# Altium PCB HLK-7621-ALL-KIT-V2.4.PcbDoc (part 2 of 2)
Units mm, origin at the board's own origin, x right, y up, seen from the top; angles counter-clockwise.
Board outline 140 x 100 mm, 2 copper layers (Top Layer, Bottom Layer); 119 components, 240 nets, 725 pads, 586 vias.
Unrouted connection lines stored in the file: 2.
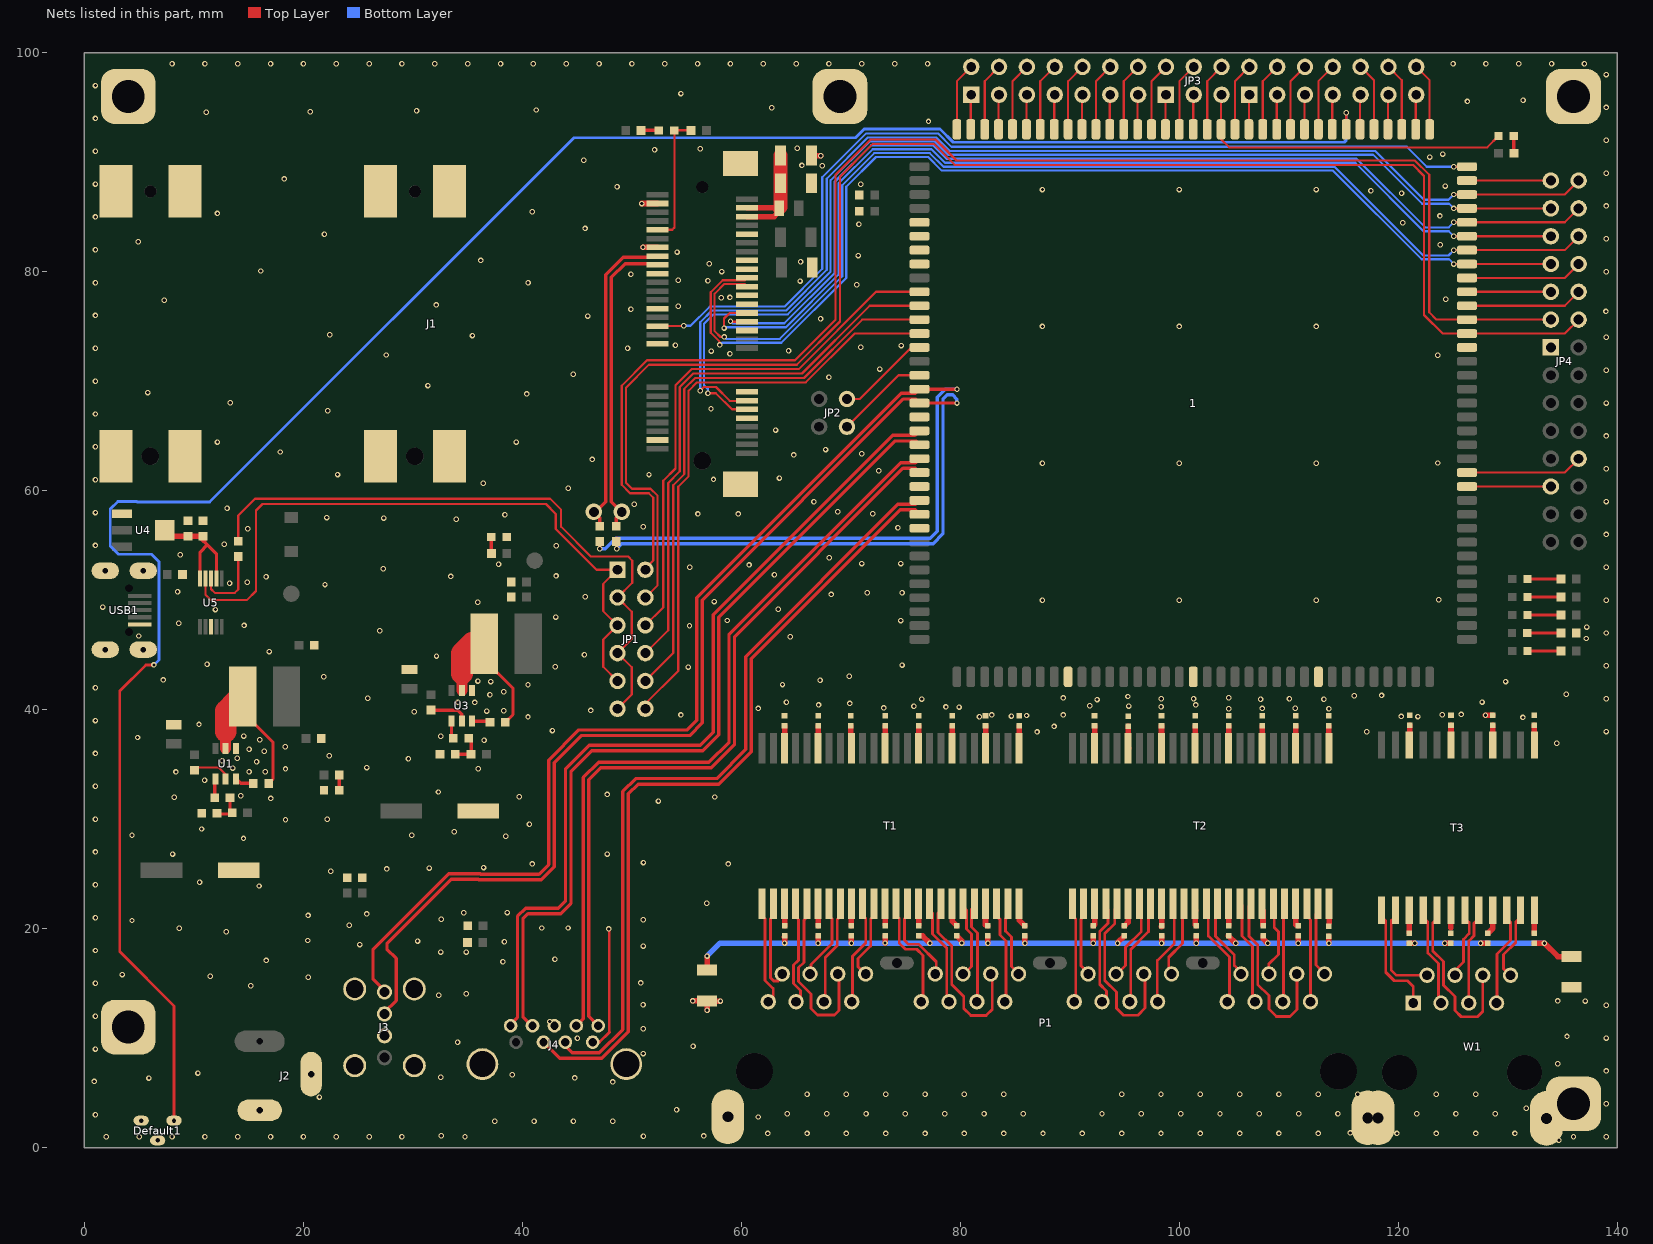
[diagram p2: the nets of this part, all layers, seen from the top]

## Via types
v1: diameter 0.5, hole 0.3, Top Layer to Bottom Layer, tented both sides, 584 vias
v2: diameter 1.5, hole 0.9, Top Layer to Bottom Layer, 2 vias

## Nets (pads, with @x,y where several pads share a name; then routed paths per layer and width w, separated by ;. In a path a pad name is that pad's centre, name@x,y a point inside that pad or via, vN(x,y) a via of type N, cw(c..) or ccw(c..) an arc to the next point about the centre after c; other vN are vias at no path point) (continued)
GND: 1.5 1.6 1.7 1.8 1.19 1.24 1.27 1.44 1.53 1.62 1.92 1.119 1.125 C4.2 C5.2 C7.2 C9.2 C10.2 C11.2 C12.2 C13.2 C14.2 C15.2 C18.2 C19.2 C20.2 C21.2 C22.2 C23.2 C24.2 C25.2 C26.2 C27.1 C28.1 C29.1 C30.1 C31.1 C32.1 C33.1 C34.1 C35.1 C36.1 C37.1 C38.1 C39.1 C40.1 C41.1 C42.1 C43.1 C44.1 C45.1 C46.1 C47.2 C48.2 C49.1 D6.2 D7.2 Default1.2 Default1.3 J1.4 J1.9 J1.15 J1.18 J1.21 J1.26 J1.27 J1.29 J1.34 J1.35 J1.37 J1.40 J1.43 J1.50 J1.55 J1.56 J1.57 J1.58 J1.59 J1.60 J1.63 J1.64 J1.65 J1.66 J2.2 J2.3 J3.4 J3.5 J3.6 J3.7 J3.8 J4.4 J4.7 J4.10 J4.11 JP3.15 JP3.21 JP4.13 pad.0@58.758,2.815 pad.0@117.208,2.715 pad.0@118.158,2.715 pad.1@4,11 pad.1@4,96 pad.1@69,96 pad.1@136,4 pad.1@136,96 R4.1 R11.1 R46.1 U1.1 U3.1 U4.1 U5.3 USB1.5 USB1.6 USB1.7 USB1.8 USB1.9 W1.10 | length 25.5
  Top Layer w0.2: 1.125@98.73,93 98.73,96.119 JP3.15@98.776,96.164 ; 1.119@106.35,93 106.35,96.119 JP3.21@106.396,96.164
  Top Layer w0.254: J4.4@46.421,9.627 47.048,9.627 47.96,10.539 ; v1(47.893,19.968) 47.93,19.93 47.93,10.539
  Top Layer w0.508: v1(50.888,86.225) 50.94,86.225 50.942,86.227 J1.50@52.325,86.227 ; v1(51.015,82.238) 52.325,82.238 J1.40@52.325,82.227 ; v1(55.562,13.396) C23.2@56.796,13.396 ; v1(56.866,12.545) C23.2@56.866,13.38 ; v1(58.089,13.38) C23.2@56.866,13.38 ; C25.2@66.385,90.62 66.385,90.594 v1(67.245,90.594) ; v1(127.963,39.495) C45.1@128.623,39.495 ; C23.2@56.796,13.396 56.796,13.405 C23.2@56.866,13.405 C23.2@56.866,13.38 ; C23.2@56.796,13.396 56.796,13.38 C23.2@56.866,13.38
  other v1: 134.671,0.66 2,1 5,1 8,1 11,1 14,1 17,1 20,1 23,1 26,1 29,1 34.755,0.994 136,1 139,1 51.058,1.031 32.587,1.069 56.558,1.065 62.403,1.289 65.995,1.289 69.587,1.289 73.179,1.289 76.772,1.289 80.364,1.289 83.956,1.289 87.548,1.289 91.14,1.289 94.732,1.289 98.324,1.289 101.916,1.289 105.508,1.289 109.101,1.289 112.693,1.289 119.877,1.289 123.469,1.289 127.061,1.289 130.653,1.289 115.618,1.336 37.472,2.402 41.064,2.402 44.656,2.402 48.248,2.402 61.539,2.794 1,3 64.199,3.085 67.791,3.085 71.383,3.085 74.976,3.085 78.568,3.085 82.16,3.085 85.752,3.085 92.936,3.085 96.528,3.085 100.12,3.085 103.712,3.085 107.304,3.085 110.897,3.085 114.489,3.085 121.673,3.085 125.265,3.085 128.857,3.085 54.078,3.445 131.674,3.581 139,4 21.461,4.613 65.995,4.881 69.587,4.881 73.179,4.881 76.772,4.881 80.364,4.881 83.956,4.881 94.732,4.881 98.324,4.881 101.916,4.881 105.508,4.881 109.101,4.881 112.693,4.881 116.285,4.881 123.469,4.881 127.061,4.881 48.248,5.994 0.889,6.045 5.893,6.35 44.778,6.365 32.553,6.426 39.063,6.645 10.363,6.807 139,7 134.567,7.661 51.03,8.584 1,9 55.588,9.245 34.075,9.625 45.029,9.982 139,10 135.405,10.15 51.03,10.865 42.489,11.506 1,12 139,13 51.02,13.034 137.076,13.38 134.549,13.396 32.355,13.919 34.862,14.046 15.175,14.775 1,15 50.82,15.037 20.445,15.56 11.481,15.646 3.454,15.799 38.222,16.967 16.612,17.094 42.974,17.194 32.553,17.856 34.862,17.856 1,18 51.043,18.408 25.146,18.542 38.354,18.796 30.427,18.862 20.394,18.913 12.952,19.726 8.659,20.03 41.755,20.056 44.168,20.056 24.178,20.31 4.341,20.742 51.03,20.811 32.587,20.848 1,21 20.419,21.199 25.781,21.336 34.643,21.453 38.608,21.463 56.828,22.316 15.949,23.891 1,24 10.513,24.221 22.504,25.248 27.61,25.451 31.496,25.527 36.449,25.578 40.89,25.908 58.801,25.908 51.054,26.035 8.049,26.812 47.738,26.805 1,27 14.526,28.235 38.479,28.438 4.341,28.514 29.893,28.514 33.78,28.844 10.691,29.098 40.638,29.53 18.362,29.936 1,30 22.172,29.987 52.42,31.65 17.016,31.892 8.202,31.994 57.579,32.019 39.723,32.045 14.272,32.146 47.758,32.255 32.332,32.476 1,33 10.97,33.543 8.354,34.305 15.034,34.331 16.508,34.331 18.362,34.585 35.964,34.61 13.536,34.661 25.779,34.712 15.72,35.245 12.571,35.321 29.589,35.524 13.942,35.55 22.35,35.778 1,36 16.431,36.21 15.034,36.388 18.336,36.617 134.459,36.941 36.497,37.201 16,37.252 4.849,37.455 32.535,37.556 14.552,37.582 87.008,37.965 117.108,37.985 139,38 42.746,38.09 88.558,38.465 10.462,38.649 1,39 131.381,39.286 40.511,39.334 81.738,39.355 121.788,39.365 120.278,39.375 84.668,39.415 86.048,39.465 54.481,39.512 82.858,39.515 89.408,39.515 124.008,39.545 125.738,39.565 30.122,39.817 36.751,39.868 38.301,39.893 46.253,39.929 104.519,40.088 113.663,40.088 61.54,40.11 107.567,40.113 72.998,40.155 110.589,40.139 79.878,40.235 78.678,40.245 98.328,40.275 75.758,40.315 95.388,40.325 91.828,40.355 67.048,40.425 101.498,40.425 69.901,40.564 34.11,40.655 35.659,40.655 64.118,40.675 127.648,40.695 92.481,40.919 107.417,40.945 113.208,40.945 76.468,40.965 98.349,40.996 101.295,40.996 110.058,40.995 139,41 25.88,41.036 89.408,41.065 104.521,41.097 95.301,41.199 115.976,41.275 118.466,41.3 37.031,41.366 135.329,41.417 38.301,41.62 1,42 40.511,42.281 63.754,42.291 37.107,42.56 129.792,42.56 35.939,42.611 67.183,42.672 7.186,42.713 21.867,42.992 69.85,43.053 55.15,43.89 43,43.906 139,44 74.676,44.069 11.199,44.135 32.154,44.897 45.667,45.024 16.889,45.303 137.158,46.497 64.463,46.65 4.948,46.726 139,47 26.972,47.208 137.208,47.539 55.26,47.66 14.577,47.691 8.608,47.894 74.549,48.133 58.7,48.14 43.051,48.453 11.961,49.139 63.371,49.175 1.674,49.367 35.913,49.799 57.52,49.87 87.5,50 100,50 112.5,50 139,50 123.696,50.028 45.743,50.307 68.22,50.52 71.501,50.673 74.676,50.673 8.507,50.764 21.969,51.425 13.256,51.552 14.88,51.64 16.584,52.136 33.449,52.161 43.076,52.212 63.015,52.314 27.277,52.873 55.28,53.01 139,53 60.704,53.216 37.818,53.279 70.993,53.34 74.549,53.34 68.02,53.86 8.761,54.143 43.101,54.955 1,55 12.774,55.108 139,56 14.92,56.51 74.3,56.62 51.026,56.708 33.957,57.394 27.328,57.495 22.121,57.546 38.402,57.8 56.03,57.876 59.713,57.876 72.007,57.902 1,58 68.8,58.07 13.028,58.384 50.213,58.765 66.63,58.99 139,59 44.194,60.213 36.424,60.681 1,61 57.452,61.026 63.472,61.153 23.114,61.468 51.562,61.468 72.54,61.813 139,62 87.5,62.5 100,62.5 112.5,62.5 123.594,62.525 46.378,62.855 64.793,63.261 70.993,63.373 17.882,63.531 67.691,63.754 1,64 12.141,64.44 39.446,64.44 139,65 63.119,65.532 1,67 22.225,67.31 57.224,67.478 13.31,68.021 139,68 40.386,68.834 5.79,68.961 31.369,69.596 1,70 67.993,70.348 44.651,70.627 139,71 72.63,71.11 123.594,72.354 27.559,72.39 58.953,72.517 57.252,72.746 64.31,72.786 1,73 49.604,73.015 70.914,73.091 74.61,73.25 53.975,73.279 139,74 35.433,74.168 22.403,74.244 87.5,75 100,75 112.5,75 67.231,75.707 45.974,75.946 1,76 138.961,76.368 49.911,76.581 54.229,76.835 32.131,76.962 7.29,77.394 124.333,77.47 58.166,77.622 58.953,77.648 70.533,78.806 40.513,78.994 1,79 65.354,79.146 56.947,79.172 54.229,79.223 49.911,79.756 58.217,80.01 139,80 16.104,80.061 57.074,80.721 65.405,80.899 36.195,81.026 70.66,81.473 54.127,81.788 1,82 123.825,82.448 4.902,82.728 139,83 21.92,83.414 45.72,83.947 70.737,84.343 120.396,84.48 1,85 123.8,85.09 12.141,85.319 40.894,85.471 139,86 120.292,87.163 117.498,87.391 87.5,87.5 100,87.5 112.5,87.5 48.641,87.757 124.28,87.823 70.914,87.975 1,88 18.237,88.468 139,89 67.386,89.687 65.53,89.703 45.593,90.17 122.883,90.465 124.049,90.744 1,91 52.07,91.135 56.236,91.237 65.098,91.277 139,92 77.089,93.726 1,94 11.125,94.564 20.625,94.615 30.332,94.691 41.275,94.767 62.763,94.971 139,95 126.312,95.545 131.392,95.646 54.483,96.266 1,97 139,98 8,99 11,99 14,99 17,99 20,99 23,99 26,99 29,99 32,99 35,99 38,99 41,99 44,99 47,99 50,99 53,99 56,99 59,99 62,99 65,99 68,99 71,99 74,99 77,99 125,99 128,99 131,99 134,99 137,99
GPIO0: 1.104 JP4.1 | length 7.7
  Top Layer w0.2: 1.104@126.27,88.32 JP4.1@133.929,88.32
I2C_SCLK: 1.96 JP4.9 | length 7.7
  Top Layer w0.2: 1.96@126.27,78.16 JP4.9@133.929,78.16
I2C_SD: 1.97 JP4.8 | length 10.7
  Top Layer w0.2: 1.97@126.27,79.43 135.199,79.43 JP4.8@136.469,80.7
JTCLK: 1.124 JP3.18 | length 6.2
  Top Layer w0.2: 1.124@100,93 100,97.389 JP3.18@101.316,98.704
JTDI: 1.122 JP3.20 | length 6.2
  Top Layer w0.2: 1.122@102.54,93 102.54,97.389 JP3.20@103.856,98.704
JTDO: 1.121 D9.2 JP3.19 | length 30.2
  Top Layer w0.2: JP3.19@103.856,96.164 103.81,96.119 1.121@103.81,93 103.81,92.108 104.564,91.354 128.115,91.354 D9.2@129.157,92.395
JTMS: 1.120 JP3.22 | length 6.2
  Top Layer w0.2: 1.120@105.08,93 105.08,97.389 JP3.22@106.396,98.704
JTRST_N: 1.123 JP3.17 | length 3.2
  Top Layer w0.2: 1.123@101.27,93 101.27,96.119 JP3.17@101.316,96.164
LDO-3.3V: C4.1 C7.1 U4.0 U5.7 U5.10 | length 11.1
  Top Layer w0.3: U5.10@10.555,51.974 10.555,54.376 11.23,55.051 ; 10.996,55.286 11.23,55.051 ; U5.7@12.055,51.974 12.055,54.227 11.23,55.051
  Top Layer w0.5: U4.0@7.32,56.382 7.858,55.844 C4.1@9.446,55.844 10.539,55.844 10.678,55.705 C7.1@10.894,55.489
LED_WLAN_SOCKET: D8.1 J1.44 R16.2 | length 12.2
  Top Layer w0.2: J1.44@52.325,83.827 53.683,83.827 53.894,84.038 53.894,92.808 53.83,92.872 D8.1@53.797,92.906
  Top Layer w0.254: D8.1@53.797,92.906 53.804,92.913 53.859,92.913 R16.2@55.406,92.913
MDC: 1.83 JP4.22 | length 10.7
  Top Layer w0.2: 1.83@126.27,61.65 135.199,61.65 JP4.22@136.469,62.92
MDIO: 1.82 JP4.23 | length 7.7
  Top Layer w0.2: 1.82@126.27,60.38 JP4.23@133.929,60.38
ND_ALE: 1.138 JP3.4 | length 6.2
  Top Layer w0.2: 1.138@82.22,93 82.22,97.389 JP3.4@83.536,98.704
ND_CLE: 1.137 JP3.3 | length 3
  Top Layer w0.2: 1.137@83.49,93 83.49,95.89 JP3.3@83.536,95.936
ND_CS_N: 1.136 JP3.6 | length 6.2
  Top Layer w0.2: 1.136@84.76,93 84.76,97.389 JP3.6@86.076,98.704
ND_D0: 1.133 JP3.7 | length 3.2
  Top Layer w0.2: 1.133@88.57,93 88.57,96.119 JP3.7@88.616,96.164
ND_D1: 1.132 JP3.10 | length 6.2
  Top Layer w0.2: 1.132@89.84,93 89.84,97.389 JP3.10@91.156,98.704
ND_D2: 1.131 JP3.9 | length 3.2
  Top Layer w0.2: 1.131@91.11,93 91.11,96.119 JP3.9@91.156,96.164
ND_D3: 1.130 JP3.12 | length 6.2
  Top Layer w0.2: 1.130@92.38,93 92.38,97.389 JP3.12@93.696,98.704
ND_D4: 1.129 JP3.11 | length 3.2
  Top Layer w0.2: 1.129@93.65,93 93.65,96.119 JP3.11@93.696,96.164
ND_D5: 1.128 JP3.14 | length 6.2
  Top Layer w0.2: 1.128@94.92,93 94.92,97.389 JP3.14@96.236,98.704
ND_D6: 1.127 JP3.13 | length 3.2
  Top Layer w0.2: 1.127@96.19,93 96.19,96.119 JP3.13@96.236,96.164
ND_D7: 1.126 JP3.16 | length 6.2
  Top Layer w0.2: 1.126@97.46,93 97.46,97.389 JP3.16@98.776,98.704
ND_RB_N: 1.134 JP3.8 | length 6.2
  Top Layer w0.2: 1.134@87.3,93 87.3,97.389 JP3.8@88.616,98.704
ND_RE_N: 1.135 JP3.5 | length 3.2
  Top Layer w0.2: 1.135@86.03,93 86.03,96.119 JP3.5@86.076,96.164
ND_WE_N: 1.139 JP3.1 | length 3.2
  Top Layer w0.2: 1.139@80.95,93 80.95,96.119 JP3.1@80.996,96.164
ND_WP: 1.140 JP3.2 | length 6.2
  Top Layer w0.2: 1.140@79.68,93 79.68,97.389 JP3.2@80.996,98.704
NetC8_1: C8.1 L1.1 U1.2 | length 13.9
  Top Layer w0.3: L1.1@14.457,41.189 14.457,39.785 17.219,37.023 17.219,33.656 C8.1@16.827,33.264
  Top Layer w1: U1.2@12.901,36.467 12.901,38.014
  Top Layer w2: 12.901,38.014 12.901,39.868 L1.1@13.822,40.789
NetC8_2: C8.2 U1.6 | length 1.7
  Top Layer w0.3: U1.6@13.851,33.667 14.254,33.264 C8.2@15.427,33.264
NetC17_1: C17.1 L2.1 U3.2 | length 13.2
  Top Layer w0.3: L2.1@36.529,46.015 36.529,44.56 39.139,41.951 39.139,39.549 C17.1@38.442,38.852
  Top Layer w1: U3.2@34.465,41.75 34.465,43.297
  Top Layer w2: 34.465,43.297 34.465,45.151 L2.1@35.386,46.072
NetC17_2: C17.2 U3.6 | length 1.7
  Top Layer w0.3: U3.6@35.415,38.95 36.943,38.95 C17.2@37.042,38.852
NetC23_1: C23.1 C47.1 R19.1 R20.1 R21.1 R22.1 R23.1 R24.1 R25.1 R26.1 R27.1 R28.1 R29.1 R30.1 R31.1 R32.1 R33.1 R34.1 R35.1 R36.1 R37.1 R38.1 | length 96.3
  Top Layer w0.508: C23.1@56.866,16.205 v1@56.866,17.492 ; R19.1@63.938,19.232 R19.1@63.942,19.236 ; v1@63.942,18.669 R19.1@63.942,19.338 ; v1@67,18.662 R20.1@67,19.331 ; v1@70.048,18.662 R21.1@70.048,19.331 ; v1@73.124,18.676 R22.1@73.124,19.345 ; R23.1@76.195,19.331 76.552,19.331 v1(77.218,18.665) ; R24.1@79.675,19.331 80.128,18.878 v1@80.128,18.666 ; v1@82.52,18.662 R25.1@82.52,19.331 ; v1@85.898,18.662 R26.1@85.898,19.331 ; v1@92.131,18.662 R27.1@92.131,19.331 ; v1@94.358,18.646 94.358,18.713 R28.1@94.976,19.331 ; v1@98.38,18.662 R29.1@98.38,19.331 R29.1@98.38,19.113 ; v1@101.555,18.662 R30.1@101.555,19.331 ; R31.1@104.501,19.331 104.482,19.331 v1(105.148,18.665) ; R32.1@107.651,19.331 107.651,19.082 v1(108.068,18.665) ; v1@110.866,18.662 R33.1@110.866,19.331 ; v1@113.663,18.65 R34.1@113.663,19.319 ; R35.1@121.017,18.665 v1(121.508,18.665) ; v1(124.234,18.659) R36.1@124.796,18.659 ; v1(127.514,18.659) R37.1@128.163,18.659 ; R38.1@132.416,18.665 v1(133.348,18.665) 134.57,17.443 C47.1@135.783,17.443
  Bottom Layer w0.508: v1(56.868,17.495) 58.044,18.671 66.998,18.671 70.048,18.671 v1@73.096,18.671 ; v1@73.124,18.671 82.977,18.671 ; 82.983,18.665 91.988,18.665 95.061,18.665 ; 95.067,18.671 97.937,18.671 ; 97.943,18.665 108.008,18.665 v1(121.508,18.665) v1(133.348,18.665)
  other v1: 67,18.672 70.048,18.672 82.52,18.672 85.898,18.672 92.131,18.672 94.358,18.656 98.38,18.672 101.555,18.672 110.866,18.672 113.663,18.66 63.942,18.679 73.124,18.686 80.128,18.676
NetC27_2: C27.2 T1.22 | length 3
  Top Layer w0.508: T1.22@63.942,37.425 T1.22@63.942,36.478 C27.2@63.942,38.523
NetC28_2: C28.2 T1.19 | length 1.6
  Top Layer w0.508: T1.19@67.002,36.478 T1.19@67.028,36.478 ; T1.19@67.003,36.928 C28.2@67.003,38.523
NetC29_2: C29.2 T1.16 | length 2.1
  Top Layer w0.508: C29.2@70,38.523 70,36.478 T1.16@70.062,36.478
NetC30_2: C30.2 T1.13 | length 2
  Top Layer w0.508: T1.13@73.122,36.478 C30.2@73.122,38.523
NetC31_2: C31.2 T1.10 | length 2
  Top Layer w0.508: T1.10@76.182,36.478 C31.2@76.182,38.522
NetC32_2: C32.2 T1.7 | length 2.1
  Top Layer w0.508: T1.7@79.195,36.478 T1.7@79.242,36.478 ; T1.7@79.245,36.478 C32.2@79.246,38.522
NetC33_2: C33.2 T1.4 | length 2.1
  Top Layer w0.508: T1.4@82.243,36.478 T1.4@82.302,36.478 C33.2@82.303,38.523
NetC34_2: C34.2 T1.1 | length 2
  Top Layer w0.508: T1.1@85.362,36.478 C34.2@85.362,38.523
NetC35_2: C35.2 T2.22 | length 2.1
  Top Layer w0.508: T2.22@92.255,36.478 C35.2@92.255,38.513 ; T2.22@92.263,36.478 T2.22@92.327,36.478
NetC36_2: C36.2 T2.19 | length 2.1
  Top Layer w0.508: T2.19@95.323,36.478 T2.19@95.375,36.478 ; T2.19@95.328,36.48 C36.2@95.328,38.496
NetC37_2: C37.2 T2.16 | length 1.6
  Top Layer w0.508: T2.16@98.372,36.918 C37.2@98.372,38.513 ; T2.16@98.383,36.478 T2.16@98.423,36.478
NetC38_2: C38.2 T2.13 | length 1.6
  Top Layer w0.508: T2.13@101.443,36.478 T2.13@101.471,36.478 ; T2.13@101.445,36.918 C38.2@101.445,38.513
NetC39_2: C39.2 T2.10 | length 1.6
  Top Layer w0.508: T2.10@104.493,36.918 C39.2@104.493,38.513 ; T2.10@104.503,36.478 T2.10@104.519,36.478
NetC40_2: C40.2 T2.7 | length 1.6
  Top Layer w0.508: T2.7@107.563,36.478 T2.7@107.567,36.478 ; T2.7@107.567,36.918 C40.2@107.567,38.513
NetC41_2: C41.2 T2.4 | length 1.6
  Top Layer w0.508: T2.4@110.615,36.478 T2.4@110.623,36.478 ; T2.4@110.615,36.918 C41.2@110.615,38.513
NetC42_2: C42.2 T2.1 | length 1.6
  Top Layer w0.508: T2.1@113.663,36.478 T2.1@113.683,36.478 ; T2.1@113.663,36.918 C42.2@113.663,38.513
NetC43_2: C43.2 T3.10 | length 1.6
  Top Layer w0.508: T3.10@121.003,37.055 121.029,37.055 C43.2@121.029,38.581
NetC44_2: C44.2 T3.7 | length 1.5
  Top Layer w0.508: T3.7@124.813,37.055 C44.2@124.813,38.581
NetC45_2: C45.2 T3.4 | length 1.5
  Top Layer w0.508: T3.4@128.623,37.055 C45.2@128.623,38.581
NetC46_2: C46.2 T3.1 | length 1.5
  Top Layer w0.508: T3.1@132.433,37.055 C46.2@132.433,38.581
NetD0_1: D0.1 R43.2 | length 3.1
  Top Layer w0.3: D0.1@131.798,51.933 R43.2@134.857,51.933
NetD1_1: D1.1 R44.2 | length 3.1
  Top Layer w0.3: D1.1@131.798,50.288 R44.2@134.857,50.288
NetD2_1: D2.1 R45.2 | length 3.1
  Top Layer w0.3: D2.1@131.798,48.644 R45.2@134.857,48.644
NetD3_2: D3.2 R46.2 | length 3.1
  Top Layer w0.3: D3.2@131.773,46.999 R46.2@134.857,46.999
NetD4_1: D4.1 R47.2 | length 3.1
  Top Layer w0.3: D4.1@131.798,45.354 R47.2@134.857,45.354
NetD6_1: D6.1 R41.2 | length 1.5
  Top Layer w0.305: D6.1@37.168,55.766 37.168,54.282 R41.2@37.18,54.27
NetD7_1: D7.1 R42.2 | length 1.4
  Top Layer w0.3: D7.1@23.276,32.631 23.278,32.633 R42.2@23.278,34.026
NetD8_2: D8.2 R15.1 | length 1.5
  Top Layer w0.305: R15.1@50.837,92.906 D8.2@52.297,92.906
NetD9_1: D9.1 R40.2 | length 1.6
  Top Layer w0.3: R40.2@130.554,90.82 D9.1@130.554,92.395
NetJ1_36: J1.36 R48.1 | length 28
  Top Layer w0.305: R48.1@48.562,56.849 48.562,57.546 v2(49.07,58.054) 48.127,58.997 48.127,79.489 49.375,80.736 52.215,80.736 J1.36@52.325,80.627
NetJ1_38: J1.38 R49.1 | length 29
  Top Layer w0.305: R49.1@47.064,56.849 47.064,57.521 v2(46.53,58.054) 46.683,58.054 47.623,58.994 47.623,79.72 49.223,81.321 52.218,81.321 J1.38@52.325,81.427
NetP1_1: P1.1 T1.25 | length 8.3
  Top Layer w0.254: T1.25@61.908,21.165 62.158,20.915 62.158,15.265 62.904,14.519 P1.1@62.904,13.366
  Top Layer w0.3: P1.1@62.863,13.325 P1.1@62.904,13.366
NetP1_2: P1.2 T1.26 | length 8.8
  Top Layer w0.254: T1.26@62.922,21.179 62.658,20.915 62.658,15.515 62.958,15.215 63.358,15.215 P1.2@64.07,15.927
  Top Layer w0.3: T1.26@62.922,21.179 T1.26@62.922,22.278 ; P1.2@64.07,15.927 P1.2@64.133,15.865
NetP1_3: P1.3 T1.28 | length 9.6
  Top Layer w0.254: T1.28@64.889,22.204 T1.28@64.962,22.278 64.962,21.061 65.208,20.815 65.208,17.115 64.768,16.675 64.768,14.975 65.403,14.34 P1.3@65.403,13.325
NetP1_4: P1.4 T1.31 | length 6.3
  Top Layer w0.254: P1.4@66.368,15.865 66.368,16.725 68.281,18.638 68.281,20.892 T1.31@67.958,21.215 ; P1.4@66.786,15.865 P1.4@66.858,15.865
NetP1_5: P1.5 T1.32 | length 8.3
  Top Layer w0.254: P1.5@67.943,13.325 67.658,13.609 67.658,17.365 68.758,18.465 68.758,20.815 T1.32@68.908,20.965 ; T1.32@69.008,21.615 T1.32@69.058,21.615
NetP1_6: P1.6 T1.29 | length 15.6
  Top Layer w0.254: T1.29@66.008,21.065 65.708,20.765 65.708,16.915 65.228,16.435 65.228,15.165 66.358,14.035 66.358,12.715 66.958,12.115 68.508,12.115 68.908,12.515 68.908,15.469 P1.6@69.213,15.774
  Top Layer w0.3: P1.6@69.213,15.774 P1.6@69.258,15.819
NetP1_7: P1.7 T1.34 | length 10
  Top Layer w0.254: P1.7@70.178,13.325 70.158,13.345 70.158,17.471 71.358,18.671 71.358,20.915 T1.34@71.082,21.191
  Top Layer w0.3: P1.7@70.158,13.649 P1.7@70.483,13.325 ; T1.34@71.082,21.191 T1.34@71.082,22.278
NetP1_8: P1.8 T1.35 | length 8
  Top Layer w0.254: P1.8@71.308,15.865 70.658,16.515 70.658,17.264 71.808,18.414 71.808,20.865 T1.35@72.102,21.159 ; T1.35@71.908,20.965 T1.35@72.102,21.159 ; T1.35@72.102,22.278 T1.35@72.102,21.159
  Top Layer w0.3: P1.8@71.308,15.865 P1.8@71.753,15.865
NetP1_9: P1.9 T1.37 | length 9.3
  Top Layer w0.254: T1.37@74.258,21.065 74.408,20.915 74.408,18.683 74.98,18.111 76.02,18.111 76.588,17.543 76.588,13.345 P1.9@76.608,13.325
NetP1_10: P1.10 T1.38 | length 7.5
  Top Layer w0.254: T1.38@75.058,21.065 74.885,20.892 74.885,18.938 75.258,18.565 76.208,18.565 77.798,16.975 P1.10@77.798,15.865
  Top Layer w0.3: P1.10@77.808,16.159 P1.10@78.103,15.865
NetP1_11: P1.11 T1.40 | length 9.2
  Top Layer w0.254: T1.40@77.208,21.665 77.458,21.415 77.458,19.519 78.758,18.219 78.758,13.939 P1.11@79.172,13.526
  Top Layer w0.305: P1.11@79.172,13.526 P1.11@79.373,13.325
NetP1_12: P1.12 T1.43 | length 6.5
  Top Layer w0.254: P1.12@80.338,15.865 81.008,16.535 81.008,19.512 80.554,19.966 80.554,21.705 T1.43@80.4,21.859
NetP1_13: P1.13 T1.44 | length 8.6
  Top Layer w0.254: T1.44@81.1,21.876 81.008,21.784 81.008,20.154 81.558,19.604 81.558,13.679 P1.13@81.658,13.579
NetP1_14: P1.14 T1.41 | length 16.4
  Top Layer w0.254: T1.41@78.153,21.631 77.958,21.435 77.958,19.661 79.212,18.407 79.212,14.891 80.308,13.795 80.308,12.715 80.958,12.065 82.358,12.065 82.908,12.615 82.908,15.59 P1.14@83.183,15.865
NetP1_15: P1.15 T1.46 | length 8.3
  Top Layer w0.254: 83.614,20.859 83.614,19.409 84.158,18.865 P1.15@84.158,13.619
  Top Layer w0.3: T1.46@83.308,21.165 83.614,20.859 ; P1.15@84.158,13.619 P1.15@84.453,13.325
NetP1_16: P1.16 T1.47 | length 6.4
  Top Layer w0.254: 84.114,20.871 84.114,19.768 84.658,19.224 84.658,16.545 P1.16@85.53,15.673
  Top Layer w0.3: 84.114,20.871 T1.47@84.358,21.115 ; P1.16@85.53,15.673 P1.16@85.723,15.865
NetP1_17: P1.17 T2.25 | length 8.1
  Top Layer w0.254: T2.25@90.218,21.195 90.538,20.875 90.538,13.589 P1.17@90.803,13.325
NetP1_18: P1.18 T2.26 | length 5.9
  Top Layer w0.254: T2.26@91.228,21.055 91.018,20.845 91.018,16.605 91.758,15.865 P1.18@92.073,15.865
NetP1_19: P1.19 T2.28 | length 9.2
  Top Layer w0.254: P1.19@92.938,13.325 93.343,13.729 93.343,14.3 92.728,14.915 92.728,19.735 93.478,20.485 93.478,21.724 T2.28@93.419,21.783
NetP1_20: P1.20 T2.31 | length 7
  Top Layer w0.254: P1.20@94.308,15.865 95.088,16.645 95.088,18.295 96.528,19.735 96.528,21.876 T2.31@96.467,21.937
NetP1_21: P1.21 T2.32 | length 9.3
  Top Layer w0.254: P1.21@95.558,13.649 95.558,18.09 97.188,19.72 97.188,21.692 T2.32@97.254,21.758
  Top Layer w0.3: P1.21@95.558,13.649 P1.21@95.883,13.325
NetP1_22: P1.22 T2.29 | length 16.5
  Top Layer w0.254: T2.29@94.181,21.849 94.108,21.776 94.108,20.473 93.182,19.547 93.182,15.274 94.258,14.198 94.258,12.725 94.898,12.085 96.208,12.085 96.868,12.745 96.868,15.58 P1.22@97.153,15.865
  Top Layer w0.3: T2.29@94.181,21.216 T2.29@94.242,21.277
NetP1_23: P1.23 T2.34 | length 9.8
  Top Layer w0.254: P1.23@98.42,13.327 97.988,13.759 97.988,17.085 99.54,18.637 T2.34@99.54,22.141
  Top Layer w0.3: P1.23@98.42,13.327 P1.23@98.423,13.325 ; T2.34@99.403,21.644 T2.34@99.54,21.507
NetP1_24: P1.24 T2.35 | length 7.3
  Top Layer w0.254: P1.24@99.478,15.865 99.03,16.313 99.03,17.386 100.278,18.635 100.278,22.276 T2.35@100.277,22.278
  Top Layer w0.3: P1.24@99.478,15.865 99.519,15.824 P1.24@99.693,15.824
NetP1_25: P1.25 T2.37 | length 9.4
  Top Layer w0.254: T2.37@102.648,21.625 102.648,19.313 104.568,17.393 104.568,16.195 ; 104.568,16.45 104.568,16.195 ; P1.25@104.773,13.325 104.568,13.529 104.568,16.195
NetP1_26: P1.26 T2.38 | length 7
  Top Layer w0.254: T2.38@103.35,21.523 103.298,21.471 103.298,19.305 105.022,17.581 105.022,16.621 105.778,15.865 P1.26@106.043,15.865
NetP1_27: P1.27 T2.40 | length 9.7
  Top Layer w0.254: T2.40@105.712,22.143 105.712,19.321 106.678,18.355 106.678,13.959 P1.27@107.107,13.531
  Top Layer w0.3: P1.27@107.107,13.325 P1.27@107.313,13.325
  Top Layer w0.305: P1.27@107.107,13.531 P1.27@107.313,13.325
NetP1_28: P1.28 T2.43 | length 7.1
  Top Layer w0.254: P1.28@108.583,15.865 108.168,16.279 108.168,16.765 109.048,17.645 109.048,19.717 108.665,20.1 T2.43@108.665,22.278
NetP1_29: P1.29 T2.44 | length 10
  Top Layer w0.254: P1.29@109.525,13.653 T2.44@109.525,21.105 ; 109.525,20.206 T2.44@109.525,22.14
  Top Layer w0.3: P1.29@109.525,13.653 P1.29@109.853,13.325 ; T2.44@109.525,21.506 109.633,21.614 T2.44@109.663,21.644
NetP1_30: P1.30 T2.41 | length 17
  Top Layer w0.254: T2.41@106.373,22.075 106.373,19.302 107.153,18.522 107.153,14.9 108.178,13.875 108.178,12.665 108.858,11.985 110.108,11.985 110.748,12.625 110.748,15.49 P1.30@111.095,15.837
  Top Layer w0.3: T2.41@106.373,21.442 106.559,21.628 T2.41@106.575,21.644 ; P1.30@111.095,15.837 P1.30@111.123,15.865
NetP1_31: P1.31 T2.46 | length 8.6
  Top Layer w0.254: T2.46@111.783,21.707 111.783,21 111.988,20.795 111.988,13.729 P1.31@112.393,13.325
NetP1_32: P1.32 T2.47 | length 6.3
  Top Layer w0.254: T2.47@112.596,21.431 112.478,21.313 112.478,16.665 113.278,15.865 P1.32@113.663,15.865
NetR1_2: R1.2 R2.1 R4.2 | length 3.1
  Top Layer w0.3: R4.2@11.885,30.459 12.102,30.459 13.383,30.459 R1.2@13.496,30.571 13.296,30.772 R2.1@13.296,31.943
NetR2_2: R2.2 U1.4 | length 1.7
  Top Layer w0.3: R2.2@11.896,31.943 11.896,33.612 U1.4@11.951,33.667
NetR6_1: R6.1 U1.5 | length 3.3
  Top Layer w0.2: R6.1@10.27,34.712 12.266,34.712 12.901,34.077 U1.5@12.901,33.667
NetR9_1: R9.1 R10.2 R11.2 | length 3
  Top Layer w0.3: R11.2@33.87,35.931 R10.2@35.315,35.931 35.315,37.153 R9.1@35.089,37.379
NetR9_2: R9.2 U3.4 | length 1.6
  Top Layer w0.3: U3.4@33.515,38.95 33.515,37.552 R9.2@33.689,37.379
NetR14_1: R14.1 U3.5 | length 3.6
  Top Layer w0.3: R14.1@31.646,39.955 34.099,39.955 34.465,39.588 U3.5@34.465,38.95
NetR19_2: R19.2 T1.27 | length 1.4
  Top Layer w0.508: R19.2@63.942,20.252 T1.27@63.942,21.644
NetR20_2: R20.2 T1.30 | length 2.9
  Top Layer w0.381: T1.30@66.901,21.644 T1.30@67.002,21.644
  Top Layer w0.508: R20.2@67,20.245 R20.2@67.002,20.247 ; R20.2@67.002,20.247 67.002,21.644 R20.2@67.002,20.247
NetR21_2: R21.2 T1.33 | length 1.4
  Top Layer w0.508: R21.2@70.048,20.245 70.048,21.644 T1.33@70.062,21.644
NetR22_2: R22.2 T1.36 | length 1.3
  Top Layer w0.102: T1.36@73.089,21.618 T1.36@73.122,21.644
  Top Layer w0.508: R22.2@73.122,20.359 T1.36@73.122,21.644
NetR23_2: R23.2 T1.39 | length 1.3
  Top Layer w0.508: R23.2@76.182,20.334 T1.39@76.182,21.644
NetR24_2: R24.2 T1.42 | length 1.6
  Top Layer w0.508: T1.42@79.242,21.644 79.242,20.678 R24.2@79.675,20.245
NetR25_2: R25.2 T1.45 | length 2.8
  Top Layer w0.508: R25.2@82.272,20.353 82.274,20.351 82.274,21.644 82.302,21.644 82.302,20.463 R25.2@82.52,20.245
NetR26_2: R26.2 T1.48 | length 1.6
  Top Layer w0.508: T1.48@85.362,21.644 85.362,20.781 R26.2@85.898,20.245
NetR27_2: R27.2 T2.27 | length 1.5
  Top Layer w0.381: T2.27@92.174,21.644 T2.27@92.263,21.644
  Top Layer w0.508: R27.2@92.131,20.245 92.263,20.377 T2.27@92.263,21.644
NetR28_2: R28.2 T2.30 | length 1.5
  Top Layer w0.381: T2.30@95.321,21.644 T2.30@95.323,21.644
  Top Layer w0.508: R28.2@94.976,20.245 95.321,20.591 T2.30@95.321,21.644
NetR29_2: R29.2 T2.33 | length 1.5
  Top Layer w0.102: T2.33@98.367,21.63 T2.33@98.383,21.644
  Top Layer w0.508: R29.2@98.369,20.195 98.383,20.209 T2.33@98.383,21.644
NetR30_2: R30.2 T2.36 | length 1.6
  Top Layer w0.381: T2.36@101.443,21.644 T2.36@101.572,21.644
  Top Layer w0.508: T2.36@101.443,21.644 101.443,20.357 R30.2@101.555,20.245
NetR31_2: R31.2 T2.39 | length 1.4
  Top Layer w0.102: T2.39@104.475,21.606 T2.39@104.503,21.644
  Top Layer w0.381: T2.39@104.493,21.644 T2.39@104.503,21.644
  Top Layer w0.508: R31.2@104.503,20.305 T2.39@104.503,21.644
NetR32_2: R32.2 T2.42 | length 1.4
  Top Layer w0.508: T2.42@107.563,21.644 107.64,21.644 R32.2@107.64,20.322
NetR33_2: R33.2 T2.45 | length 1.6
  Top Layer w0.508: R33.2@110.623,20.347 R33.2@110.623,20.488 ; T2.45@110.623,21.644 R33.2@110.623,20.488 ; R33.2@110.866,20.245 R33.2@110.623,20.488
NetR34_2: R34.2 T2.48 | length 2.4
  Top Layer w0.102: T2.48@113.683,21.644 T2.48@113.787,21.591
  Top Layer w0.508: 113.683,20.527 113.683,21.644 113.683,20.527
NetR35_2: R35.2 T3.15 | length 1.7
  Top Layer w0.508: R35.2@120.986,19.61 120.986,21.304 T3.15@121.003,21.321
NetR36_2: R36.2 T3.18 | length 1.4
  Top Layer w0.102: 124.813,19.944 124.813,20.093
  Top Layer w0.508: 124.785,20.068 124.803,20.085 ; 124.796,20.093 124.796,21.304 T3.18@124.813,21.321
NetR37_2: R37.2 T3.21 | length 2
  Top Layer w0.508: R37.2@128.163,19.573 128.187,19.573 128.623,20.01 T3.21@128.623,21.321
NetR38_2: R38.2 T3.24 | length 1.8
  Top Layer w0.508: R38.2@132.416,19.573 132.416,21.304 T3.24@132.433,21.321
NetR39_1: R39.1 U5.8 | length 6.7
  Top Layer w0.2: U5.8@11.555,51.974 11.555,51.018 11.91,50.663 13.739,50.663 14.044,50.968 R39.1@14.044,53.976
NetT3_13: T3.13 W1.1 | length 9.6
  Top Layer w0.254: T3.13@118.628,20.917 118.848,20.697 118.848,16.018 119.631,15.235 120.848,15.235 121.359,14.724 W1.1@121.359,13.2
NetT3_14: T3.14 W1.2 | length 8.4
  Top Layer w0.254: T3.14@119.558,20.927 119.348,20.717 119.348,16.225 119.838,15.735 122.397,15.735 W1.2@122.4,15.738 ; W1.2@122.629,15.74 W1.2@122.885,15.483
NetT3_16: T3.16 W1.3 | length 8.3
  Top Layer w0.254: T3.16@122.328,20.955 122.694,20.589 122.694,17.779 123.67,16.803 W1.3@123.67,13.2
NetT3_17: T3.17 W1.6 | length 15.6
  Top Layer w0.254: T3.17@123.468,20.835 123.148,20.515 123.148,17.967 124.124,16.991 124.124,14.827 125.169,13.782 125.169,12.532 125.747,11.953 127.226,11.953 127.709,12.436 127.709,15.509 W1.6@127.48,15.738
NetT3_19: T3.19 W1.4 | length 6
  Top Layer w0.254: W1.4@124.95,15.959 125.948,16.957 125.948,19.019 126.468,19.539 126.468,20.575 T3.19@126.138,20.905
  Top Layer w0.3: W1.4@124.94,15.738 124.94,15.74 124.94,15.949 W1.4@124.95,15.959 ; W1.4@125.137,15.771 W1.4@125.169,15.74
NetT3_20: T3.20 W1.5 | length 8.2
  Top Layer w0.254: W1.5@126.21,13.198 126.439,13.426 126.439,18.868 126.922,19.351 126.922,20.499 T3.20@127.318,20.895
NetT3_22: T3.22 W1.7 | length 8.7
  Top Layer w0.254: W1.7@128.75,13.198 129.004,13.452 129.004,17.681 130.248,18.925 130.248,20.585 129.918,20.915 T3.22@129.918,21.105
NetT3_23: T3.23 W1.8 | length 6.2
  Top Layer w0.254: W1.8@130.226,15.717 129.614,16.329 129.614,17.63 130.728,18.745 130.728,20.605 T3.23@131.148,21.025
PCIE0_5V: C24.1 C25.1 J1.47 J1.49 R17.1 | length 11.3
  Top Layer w0.508: J1.47@60.525,85.027 62.988,85.027 63.475,85.514 R17.1@63.475,85.794 63.475,85.841 60.539,85.841 J1.49@60.525,85.827
  Top Layer w1.27: R17.1@63.475,85.794 63.585,85.904 C24.1@63.585,88.08 C25.1@63.585,90.62
PCIE_CKN0: 1.118 JP3.24 | length 6.2
  Top Layer w0.2: 1.118@107.62,93 107.62,97.389 JP3.24@108.936,98.704
PCIE_CKN1: 1.110 JP3.30 | length 6.2
  Top Layer w0.2: JP3.30@116.556,98.704 117.78,97.48 1.110@117.78,93
PCIE_CKN2: 1.102 J1.11 JP4.3 | length 102.3
  Top Layer w0.2: v1(56.944,68.9) 57.67,68.9 59.142,67.427 J1.11@60.525,67.427 ; v1(125.067,85.78) 1.102@126.27,85.78 JP4.3@133.929,85.78
  Bottom Layer w0.2: v1(56.944,68.9) 56.944,69.281 56.591,69.634 56.591,75.235 57.455,76.098 64.232,76.098 68.148,80.015 68.148,88.346 71.699,91.897 77.653,91.897 78.872,90.678 117.701,90.678 122.172,86.208 124.64,86.208 v1(125.067,85.78)
PCIE_CKP0: 1.117 JP3.23 | length 3.2
  Top Layer w0.2: 1.117@108.89,93 108.89,96.119 JP3.23@108.936,96.164
PCIE_CKP1: 1.111 JP3.29 | length 3.2
  Top Layer w0.2: 1.111@116.51,93 116.51,96.119 JP3.29@116.556,96.164
PCIE_CKP2: 1.103 J1.13 JP4.2 | length 106.4
  Top Layer w0.2: v1(56.233,69.129) 56.563,69.459 57.681,69.459 58.941,68.199 60.497,68.199 J1.13@60.525,68.227 ; v1(125.067,87.05) 1.103@126.27,87.05 135.199,87.05 JP4.2@136.469,88.32
  Bottom Layer w0.2: v1@56.236,69.129 56.236,75.382 57.308,76.454 64.084,76.454 67.793,80.162 67.793,88.493 71.552,92.253 77.8,92.253 79.02,91.034 117.871,91.034 122.342,86.563 124.58,86.563 v1(125.067,87.05)
PCIE_RXN0: 1.114 JP3.28 | length 6.2
  Top Layer w0.2: 1.114@112.7,93 112.7,97.389 JP3.28@114.016,98.704
PCIE_RXN1: 1.109 JP3.31 | length 3.2
  Top Layer w0.2: 1.109@119.05,93 119.05,96.119 JP3.31@119.096,96.164
PCIE_RXN2: 1.100 J1.25 JP4.5 | length 93.6
  Top Layer w0.2: v1(58.42,74.854) 58.42,75.717 58.93,76.227 J1.25@60.525,76.227 ; v1(125.067,83.24) 1.100@126.27,83.24 JP4.5@133.929,83.24
  Bottom Layer w0.2: v1(58.42,74.854) 58.496,74.93 64.069,74.93 68.859,79.72 68.859,88.052 71.994,91.186 77.358,91.186 78.603,89.941 116.058,89.941 122.306,83.693 124.614,83.693 v1(125.067,83.24)
PCIE_RXP0: 1.113 JP3.27 | length 3.2
  Top Layer w0.2: 1.113@113.97,93 113.97,96.119 JP3.27@114.016,96.164
PCIE_RXP1: 1.108 JP3.32 | length 6.2
  Top Layer w0.2: JP3.32@119.096,98.704 120.32,97.48 1.108@120.32,93
PCIE_RXP2: 1.101 J1.23 JP4.4 | length 94.5
  Top Layer w0.2: v1(59.004,75.463) 59.04,75.427 J1.23@60.525,75.427 ; v1(125.067,84.51) 1.101@126.27,84.51 135.199,84.51 JP4.4@136.469,85.78
  Bottom Layer w0.2: v1(59.004,75.463) 59.182,75.286 63.922,75.286 68.504,79.868 68.504,88.199 71.847,91.542 77.506,91.542 78.725,90.322 116.18,90.322 122.453,84.049 124.606,84.049 v1(125.067,84.51)
PCIE_TXN0: 1.115 JP3.25 | length 3.2
  Top Layer w0.2: 1.115@111.43,93 111.43,96.119 JP3.25@111.476,96.164
PCIE_TXN1: 1.107 JP3.33 | length 3.2
  Top Layer w0.2: 1.107@121.59,93 121.59,96.119 JP3.33@121.636,96.164
PCIE_TXN2: 1.98 J1.33 JP4.7 | length 101
  Top Layer w0.2: v1(58.014,73.304) 58.014,73.609 57.201,74.422 57.201,78.13 58.293,79.223 60.32,79.223 J1.33@60.525,79.427 ; v1(125.067,80.7) 1.98@126.27,80.7 JP4.7@133.929,80.7
  Bottom Layer w0.2: v1(58.014,73.304) 58.217,73.508 63.652,73.508 69.571,79.426 69.571,87.757 72.288,90.475 77.064,90.475 78.308,89.23 114.026,89.23 122.128,81.128 124.64,81.128 v1(125.067,80.7)
PCIE_TXP0: 1.116 JP3.26 | length 6.2
  Top Layer w0.2: 1.116@110.16,93 110.16,97.389 JP3.26@111.476,98.704
PCIE_TXP1: 1.106 JP3.34 | length 6.2
  Top Layer w0.2: JP3.34@121.636,98.704 122.86,97.48 1.106@122.86,93
PCIE_TXP2: 1.99 J1.31 JP4.6 | length 102.6
  Top Layer w0.2: v1(58.445,74.041) 58.085,74.041 57.556,74.569 57.556,77.983 58.44,78.867 60.285,78.867 J1.31@60.525,78.627 ; v1(125.067,81.97) 1.99@126.27,81.97 135.199,81.97 JP4.6@136.469,83.24
  Bottom Layer w0.2: v1(58.445,74.041) 58.623,73.863 63.505,73.863 69.215,79.573 69.215,87.904 72.141,90.83 77.211,90.83 78.456,89.586 114.173,89.586 122.276,81.483 124.58,81.483 v1(125.067,81.97)
PERST_N: 1.105 J1.22 | length 87.4
  Top Layer w0.2: J1.22@52.325,75.027 54.707,75.027 v1(54.737,75.057) ; v1(125.067,89.59) 1.105@126.27,89.59
  Bottom Layer w0.2: v1(54.737,75.057) 55.347,75.057 57.099,76.81 63.937,76.81 67.386,80.259 67.386,88.626 71.394,92.634 77.958,92.634 79.177,91.415 120.772,91.415 122.597,89.59 v1(125.067,89.59)
PORST_N: 1.95 JP4.10 | length 10.7
  Top Layer w0.2: 1.95@126.27,76.89 135.199,76.89 JP4.10@136.469,78.16
RTS2_N: 1.14 JP2.3 | length 8.6
  Top Layer w0.2: JP2.3@69.642,68.377 70.797,68.377 75.5,73.08 1.14@76.27,73.08
RTS3_N: 1.16 JP2.1 | length 8.6
  Top Layer w0.2: JP2.1@69.642,65.837 74.345,70.54 1.16@76.27,70.54
RX0_CH340: JP1.1 JP1.5 JP1.9 U5.9 | length 62.8
  Top Layer w0.2: U5.9@11.055,51.974 11.055,50.502 11.555,50.002 14.831,50.002 15.669,50.841 15.669,58.181 16.264,58.776 42.151,58.776 43.051,57.876 43.051,56.505 46.774,52.781 JP1.1@48.687,52.781 47.391,51.486 47.391,48.997 JP1.5@48.687,47.701 47.391,46.406 47.391,43.917 JP1.9@48.687,42.621
RXD1: 1.93 JP1.4 JP4.12 | length 140.9
  Top Layer w0.2: JP1.4@51.227,50.241 52.347,51.361 52.347,59.527 51.705,60.169 50.002,60.169 49.471,60.7 49.471,69.424 51.551,71.504 65.069,71.504 69.006,75.441 69.006,88.683 71.994,91.672 77.557,91.672 79.475,89.753 121.339,89.753 122.349,88.743 122.349,76.05 124.049,74.35 1.93@126.27,74.35 135.199,74.35 JP4.12@136.469,75.62
RXD2: 1.11 JP1.8 | length 50.6
  Top Layer w0.2: JP1.8@51.227,45.161 53.312,47.247 53.312,60.698 54.376,61.763 54.376,69.463 55.612,70.698 65.535,70.698 71.728,76.89 1.11@76.27,76.89
RXD3: 1.13 JP1.12 | length 53.9
  Top Layer w0.2: JP1.12@51.227,40.081 51.227,40.526 54.227,43.525 54.227,60.349 55.183,61.305 55.183,69.129 55.946,69.891 65.883,69.891 70.342,74.35 1.13@76.27,74.35
SSUSB_RXN: 1.23 J4.5 | length 70.7
  Top Layer w0.305: J4.5@46.921,11.127 46.071,11.977 46.071,33.599 47.161,34.69 57.24,34.69 59.375,36.825 59.375,46.668 74.759,62.052 75.868,62.052 1.23@76.27,61.65
SSUSB_RXP: 1.22 J4.6 | length 71.6
  Top Layer w0.305: J4.6@44.921,11.211 J4.6@44.921,11.127 45.566,11.772 45.566,33.808 46.952,35.195 57.031,35.195 58.87,37.034 58.87,46.877 74.55,62.557 75.907,62.557 1.22@76.27,62.92
SSUSB_TXN: 1.21 J4.8 | length 78
  Top Layer w0.305: J4.8@40.921,11.127 40.823,11.127 40.055,11.895 40.055,19.075 40.051,19.079 40.051,20.904 40.508,21.361 43.504,21.361 44.434,22.292 44.434,34.343 46.327,36.236 56.466,36.236 57.945,37.715 57.945,48.451 74.035,64.541 75.919,64.541 1.21@76.27,64.19
SSUSB_TXP: 1.20 J4.9 | length 78.7
  Top Layer w0.305: J4.9@38.921,11.127 38.921,11.251 39.55,11.88 39.55,18.866 39.546,18.87 39.546,21.113 40.299,21.866 43.295,21.866 43.93,22.501 43.93,34.552 46.118,36.741 56.257,36.741 57.44,37.924 57.44,48.66 73.826,65.046 75.856,65.046 1.20@76.27,65.46
TX0_CH340: JP1.3 JP1.7 JP1.11 R39.2 | length 58.5
  Top Layer w0.2: R39.2@14.044,55.376 14.044,57.724 15.578,59.258 42.532,59.258 43.533,58.257 43.533,56.708 46.251,53.99 49.655,53.99 50.033,53.612 50.033,51.587 JP1.3@48.687,50.241 49.982,48.946 49.982,46.457 JP1.7@48.687,45.161 49.982,43.866 49.982,41.377 JP1.11@48.687,40.081
TXD1: 1.94 JP1.2 JP4.11 | length 135.4
  Top Layer w0.2: JP1.2@51.227,52.781 51.227,52.895 51.944,53.612 51.944,59.36 51.538,59.766 49.835,59.766 49.068,60.533 49.068,69.591 51.384,71.907 64.902,71.907 68.603,75.608 68.603,88.85 71.827,92.075 77.724,92.075 79.642,90.157 121.514,90.157 122.817,88.854 122.817,76.293 123.491,75.62 1.94@126.27,75.62 JP4.11@133.929,75.62
TXD2: 1.10 JP1.6 | length 48.9
  Top Layer w0.2: JP1.6@51.227,47.701 52.855,49.329 52.855,60.898 53.973,62.017 53.973,69.63 55.445,71.101 65.236,71.101 72.295,78.16 1.10@76.27,78.16
TXD3: 1.12 JP1.10 | length 52.3
  Top Layer w0.2: JP1.10@51.227,42.621 53.769,45.164 53.769,60.498 54.78,61.509 54.78,69.296 55.779,70.295 65.716,70.295 71.042,75.62 1.12@76.27,75.62
USB_DM_P0: 1.26 J4.2 | length 73.6
  Top Layer w0.305: J4.2@41.921,9.627 43.403,8.144 47.247,8.144 49.677,10.575 49.677,32.317 50.56,33.2 57.95,33.2 60.9,36.15 60.9,44.637 74.505,58.242 75.868,58.242 1.26@76.27,57.84
USB_DM_P1: 1.18 J3.2 R48.2 | length 137.4
  Top Layer w0.305: 27.402,12.363 28.468,13.43 28.468,17.272 27.63,18.11 27.63,18.639 33.492,24.501 35.96,24.501 35.99,24.471 41.724,24.471 42.895,25.641 42.895,35.161 45.369,37.635 55.269,37.635 56.435,38.801 56.435,50.008 74.804,68.377 75.893,68.377 1.18@76.27,68 v1@79.677,68 ; R48.2@48.613,54.981 48.613,55.424 R48.2@48.613,55.678
  Bottom Layer w0.305: v1(48.613,54.701) 49.07,55.159 77.518,55.159 78.407,56.048 78.407,68.339 78.816,68.748 79.296,68.748 79.677,68.367 79.677,68 v1@79.677,67.986
  other v1: 79.692,68
USB_DP_P0: 1.25 J4.3 | length 71.6
  Top Layer w0.305: J4.3@43.921,9.627 43.921,9.292 44.564,8.649 47.038,8.649 49.173,10.784 49.173,32.526 50.351,33.705 57.741,33.705 60.395,36.359 60.395,44.847 74.296,58.747 75.907,58.747 1.25@76.27,59.11
USB_DP_P1: 1.17 J3.3 R49.2 | length 137.2
  Top Layer w0.305: 27.402,14.363 26.349,15.416 26.349,18.071 33.287,25.009 36.166,25.009 36.199,24.975 41.515,24.975 42.39,25.85 42.39,35.37 45.16,38.14 55.06,38.14 55.93,39.01 55.93,50.217 74.595,68.882 75.882,68.882 1.17@76.27,69.27 v1(79.692,69.27) ; v1@47.064,54.905 R49.2@47.064,55.424
  Bottom Layer w0.305: v1(47.064,54.701) 47.572,54.701 48.537,55.667 77.264,55.667 77.903,56.305 77.903,68.548 78.625,69.27 v1(79.692,69.27)
WDT_RST_N: 1.112 Default1.1 | length 195.4
  Top Layer w0.254: v1@6.372,44.08 v1(6.349,44.08) 5.606,44.08 3.226,41.699 3.226,17.894 8.18,12.94 Default1.1@8.18,2.46 ; 1.112@115.24,93 v1(115.24,94.503)
  Bottom Layer w0.254: v1(6.349,44.08) 6.807,44.537 6.807,53.508 6.121,54.193 3.096,54.193 2.36,54.93 2.36,58.334 3.046,59.019 4.773,59.019 4.83,58.962 11.434,58.962 44.699,92.227 70.413,92.227 71.226,93.04 78.126,93.04 79.346,91.821 115.062,91.821 115.24,91.999 v1(115.24,94.503)
pads on no net: J1.1 J1.3 J1.5 J1.6 J1.7 J1.8 J1.10 J1.12 J1.14 J1.16 J1.17 J1.19 J1.20 J1.28 J1.30 J1.32 J1.45 J1.51 J1.53 J1.54 J1.61 J1.62 J1.67 J1.68 P1.33 P1.34 U4.2 U5.4 U5.5 U5.6 USB1.0 USB1.4 W1.9

## Polygon pours and split planes (outlines as drawn)
GND on Top Layer "Top Layer-No Net" (solid, remove dead copper, pour order 12): 57.5,0 57.5,6.5 56.5,6.5 55.75,6.5 55.75,11.684 55.75,14.75 56.75,14.75 59.311,14.75 59.311,13.396 59.311,5.369 65.758,5.369 133.25,5.369 133.25,9.5 133.25,14.75 134.549,14.75 140,14.75 140,14.5 140,0 138,0 57.5,0 57.5,0.076
GND on Top Layer "Top Layer-No Net" (solid, remove dead copper, pour order 14): 58.75,0 58.75,15.402 59.75,15.402 59.75,22.467 59.75,35.723 66.279,35.723 140,35.723 140,34.19 140,100.559 129.5,100.559 0,100.559 0,91.257 0,0 1,0
5VD_E_G on Bottom Layer "Top Layer-No Net" (solid, remove dead copper, pour order 9): 50.384,85.776 59.819,85.776 64.185,81.444 64.285,81.344 64.285,78.183 64.285,77.884 63.909,77.511 61.55,77.511 58.238,80.797 56.331,82.689 52.065,82.689 50.71,82.689 50.334,83.062 50.033,83.361 50.033,84.705 50.033,85.452 50.359,85.776
GND on Bottom Layer "Top Layer-No Net" (solid, remove dead copper, pour order 11): 57.5,0 57.5,6.5 56.5,6.5 55.75,6.5 55.75,11.684 55.75,14.75 56.75,14.75 59.311,14.75 59.311,13.396 59.311,5.369 65.758,5.369 133.25,5.369 133.25,9.5 133.25,14.75 134.549,14.75 140,14.75 140,14.5 140,0 138,0 57.5,0 57.5,0.076
GND on Bottom Layer "Top Layer-No Net" (solid, remove dead copper, pour order 13): 58.75,0 58.75,15.316 59.75,15.316 59.75,22.342 59.75,35.484 66.025,35.484 140,35.484 140,34 140,100 129.5,100 0,100 0,90.75 0,0 1,0

## Keep-outs
Keep-Out Layer:
  the board outline again, w0.2

## Other copper
Top Layer:
  rectangle net 5VD_E_G: 62.25,77.419 64.409,84.277
  rectangle net 5VD: 64.917,81.788 67.203,86.563
  rectangle net 3.3V: 73.2,85.258 77.315,90.058
  rectangle net LDO-3.3V: 10.386,54.117 12.24,55.794
  pour cut-out: 35.812,48.783 40.79,48.783 41.095,48.478 41.095,43.271 41.146,43.221 36.091,43.221 35.761,43.551 35.812,43.602
  pour cut-out: 13.612,43.983 18.59,43.983 18.895,43.678 18.895,38.471 18.946,38.42 13.891,38.42 13.561,38.75 13.612,38.801
  pour cut-out: 119.61,37.915 132.787,37.915 132.787,37.647 119.61,37.647 119.61,37.915
  pour cut-out: 119.734,36.258 122.031,36.258 122.031,36.402 119.734,36.402 119.734,36.258
  pour cut-out: 122.552,36.202 132.919,36.202 132.919,36.403 122.552,36.403 122.552,36.202
  pour cut-out: 118.757,36.2 119.626,36.2 119.626,36.317 118.757,36.317 118.757,36.2
  region net 5VD: 67.017,84.905 64.578,84.905 64.578,86.556 67.017,86.556 67.017,84.905

## Silkscreen, mask and mechanical layers (free items; w line width, h text height)
Top Overlay:
  lines w0.15: 79.726,95.928 79.726,94.252 100.074,94.252 100.074,97.272 ; 84.732,94.252 84.732,99.532 87.348,99.532 87.348,95.24 92.479,95.24 92.479,97.297 94.816,97.297 94.943,97.424 94.943,99.456 95.121,99.634 100.023,99.634 ; 100.074,97.069 100.074,99.685 ; 105.179,94.894 105.179,97.348 107.617,97.348 ; 107.617,94.92 107.617,97.348 ; 107.617,99.685 107.617,97.348 ; 115.288,94.894 115.288,99.685 ; 127.734,71.897 127.734,74.386 ; 127.76,76.85 127.734,76.876 ; 127.785,71.846 132.685,71.846 135.176,71.846 135.176,74.336 ; 131.062,71.846 131.062,54.016 132.634,54.016 ; 131.087,79.797 131.087,87.086 ; 132.659,54.016 137.739,54.016 ; 132.659,87.061 135.151,87.061 135.227,87.061 135.227,89.565 ; 132.659,87.086 131.087,87.086 ; 132.659,89.59 128.075,89.59 128.075,87.086 131.087,87.086 ; 132.685,76.876 127.734,76.876 ; 132.71,76.85 135.227,76.85 137.714,76.85 ; 135.253,76.876 135.253,79.085 137.714,79.085 ; 137.714,74.336 137.638,74.336 132.659,74.336 127.785,74.336 127.734,74.386 ; 137.714,81.93 134.973,81.93 134.973,79.72 132.685,79.72 127.734,79.72 127.734,76.876 ; 137.739,55.921 139.698,55.921 139.698,64.811 137.739,64.811 ; 137.739,59.121 135.253,59.121 135.253,61.585 137.739,61.585 ; 137.739,75.377 139.723,75.377 139.723,80.432 137.739,80.432 ; 127.734,74.386 127.734,76.876
  text "2" at 79.461,98.453 h1.2 r90
  text "2" at 79.461,98.453 h1.2 r90
  text "34" at 123.911,98.174 h1.2 r90
  text "CS" at 85.443,97.094 h1.1
  text "SI" at 95.781,97.094 h1.1
  text "HOLD" at 97.356,97.094 h1.1
  text "JTAG" at 102.563,97.094 h1.1
  text "PCIE0" at 110.157,97.094 h1.1
  text "PCIE1" at 117.803,97.094 h1.1
  text "NAND" at 76.934,97.043 h1.1
  text "1" at 79.461,95.888 h1.2 r90
  text "1" at 79.461,95.888 h1.2 r90
  text "33" at 123.911,95.608 h1.2 r90
  text "HLK-7621-ALL-KIT-V2.5" at 10.053,94.869 h2
  text "GND" at 97.711,94.503 h1.1
  text "SCK" at 85.062,94.478 h1.1
  text "SO" at 92.987,94.452 h1.1
  text "WP" at 95.476,94.452 h1.1
  text "FLASH" at 88.517,94.402 h1.1
  text "JTAG" at 101.521,94.046 h1.1
  text "GND" at 105.382,94.046 h1.1
  text "PCIE1" at 117.777,94.046 h1.1
  text "PCIE0" at 110.208,94.021 h1.1
  text "+" at 52.172,93.726 h1 r90
  text "Status_LED" at 127.277,93.309 h1
  text "1" at 74.473,90.515 h1.2
  text "1" at 133.652,89.855 h1.2
  text "2" at 136.218,89.855 h1.2
  text "GPIO0" at 128.344,88.001 h1.5
  text "PCIE2" at 132.306,81.651 h1.5 r90
  text "I2C" at 129.284,77.765 h1.5
  text "PORST" at 139.139,75.783 h1.5 r90
  text "J0" at 5.671,75.123 h0.8
  text "UART0" at 128.115,75.098 h1.5
  text "GND" at 128.776,72.659 h1.5
  text "CTS3_N" at 67.308,69.764 h1 r90
  text "RTS2_N" at 69.924,69.764 h1 r90
  text "GE2" at 132.281,62.956 h1.5 r90
  text "CTS2_N" at 67.409,61.051 h1 r90
  text "RTS3_N" at 70.025,61.051 h1 r90
  text "DM" at 50.036,57.648 h0.8
  text "DP" at 44.371,57.622 h0.8
  text "ESW_DBG_B" at 139.215,56.327 h1.5 r90
  text "27" at 133.373,53.101 h1.2
  text "28" at 136.015,53.05 h1.2
  text "3.3V" at 42.162,52.949 h2
  text "TX0" at 53.137,52.324 h1.02
  text "RX0" at 53.137,49.784 h1.02
  text "5V" at 17.778,48.478 h2
  text "TX2" at 53.137,47.244 h1.02
  text "RX2" at 53.137,44.704 h1.02
  text "TX3" at 53.137,42.164 h1.02
  text "RX3" at 53.137,39.624 h1.02
  text "P4" at 126.038,38.445 h1.5
  text "P0" at 67.868,38.245 h1.5
  text "P1" at 80.108,38.145 h1.5
  text "P3" at 108.448,38.035 h1.5
  text "P2" at 96.168,38.025 h1.5
  text "12V" at 13.233,13.665 h2
Bottom Overlay:
  lines w0.2: 84.707,93.64 84.707,99.812 87.399,99.812 87.399,96.865 87.399,94.859 92.123,94.859 92.428,95.164 92.428,96.281 92.428,97.399 94.028,97.399 94.486,97.856 94.917,98.288 94.917,99.507 95.197,99.786 100.023,99.786 100.023,98.217 100.582,97.659 100.582,97.145 100.175,96.738 100.175,95.316 100.175,93.665 100.15,93.64 87.399,93.64 84.707,93.64 ; 135.253,76.926 135.253,79.466 137.742,79.466 137.742,80.559 139.723,80.559 139.723,75.504 137.742,75.504 137.742,76.926 135.253,76.926
  text "CS" at 86.713,97.145 h1.1
  text "HOLD" at 100.175,97.094 h1.1
  text "MOSI" at 97.203,97.069 h1.1
  text "GND" at 99.743,94.071 h1.1
  text "SCK" at 86.993,94.021 h1.1
  text "MISO" at 94.844,94.021 h1.1
  text "WP" at 97,94.021 h1.1
  text "FLASH" at 94.511,92.065 h2
  text "PORST" at 139,80.178 h1.5 r90